# Altium PCB PCB_DCDC.PcbDoc
Units mil, origin at the board's own origin, x right, y up, seen from the top; angles counter-clockwise.
Board outline 2345 x 1155 mil, 2 copper layers (Top Layer, Bottom Layer); 18 components, 11 nets, 43 pads, 2 vias.
Unrouted connection lines stored in the file: 13.
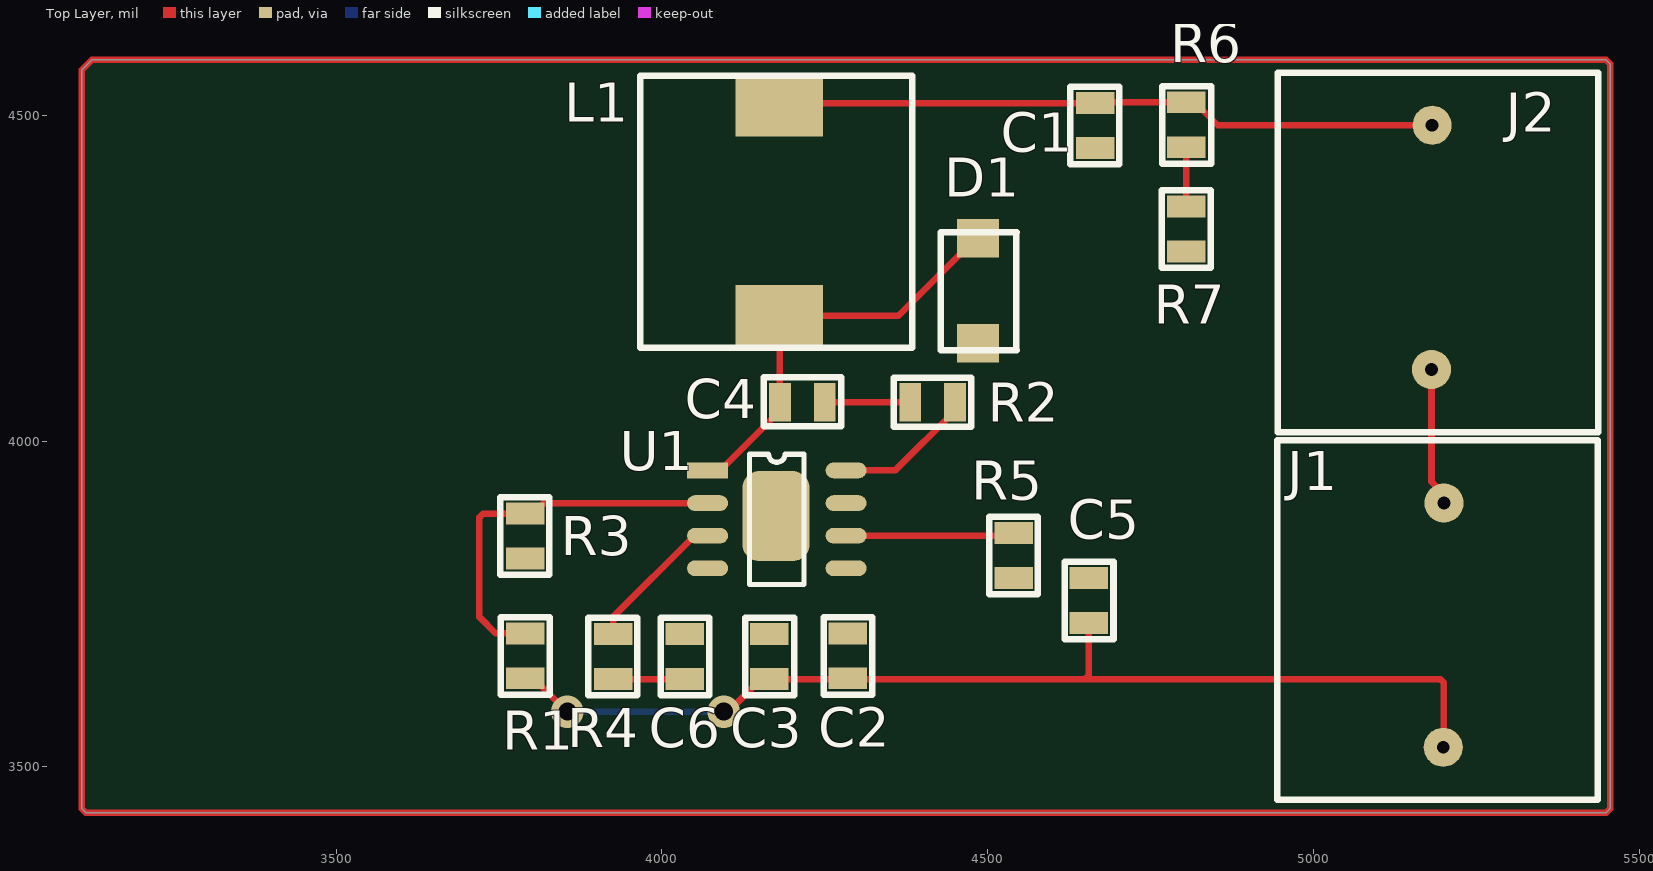
[diagram p0: Top Layer view]
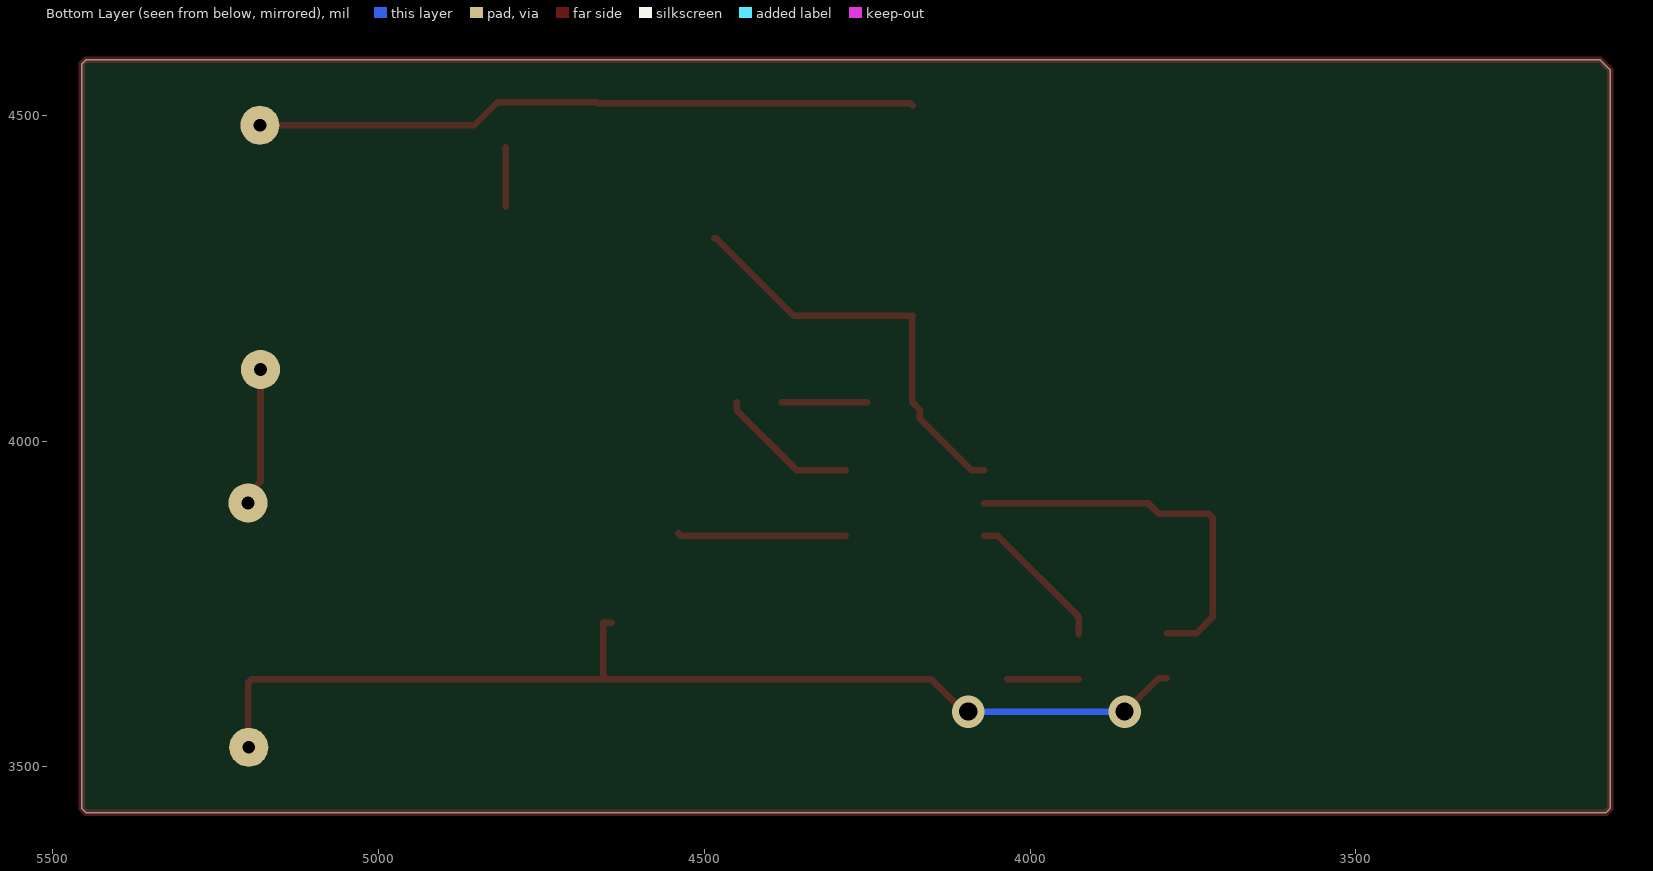
[diagram p1: Bottom Layer view, seen from below]

## Layer stack, top to bottom
Top Solder: solder mask 0.4, Solder Resist, Dk 3.5
Top Layer: signal copper 1.4
Dielectric 1: dielectric 12.6, FR-4, Dk 4.8
Bottom Layer: signal copper 1.4
Bottom Solder: solder mask 0.4, Solder Resist, Dk 3.5

## Board outline
3115.86,3430 3110,3435.86 3110,4570 3125,4585 5449.14,4585 5455,4579.14 5455,3435.86 5449.14,3430

## Design rules (kind name [scope] priority, off if disabled: settings)
Clearance [All] p1: gap=10 ignorepadtopadclearanceinfootprint=FALSE
PolygonConnect [All] p1: connectstyle=Direct reliefconductorwidth=10 reliefentries=4 polygonreliefangle="90 Angle" airgapwidth=10
RoutingVias [All] p1: holewidth=28 width=50 viastyle="Through Hole" minholewidth=28 minwidth=50 maxholewidth=28 maxwidth=50
SolderMaskExpansion [All] p1: expansion=4 istentingtop=FALSE
SupplyNets "Schematic Supply Nets_1" [InNet('GND')] p1: voltage=0.000
SupplyNets "Schematic Supply Nets" [InNet('12V')] p2: voltage=0.000
Width [All] p1: maxlimit=10 minlimit=10 preferedwidth=10
30 further rules are at their usual default settings.

## Components (designator, comment, footprint, x,y, rotation, side; value= is the part's Value field where it differs from the comment)
C1 "Capacitor" 0805 4665,4450 r90 top
C2 "4.7uF" 0805 4285,3705 r270 top
C3 "4.7uF" 0805 4165,3703.9 r270 top
C4 "0.1uF" 0805 4181.1,4060 r0 top
C5 "0.1uF" 0805 4655,3790 r270 top
C6 "220pF" 0805 4035,3703.9 r270 top
D1 "Diodo" SMA 4485,4150 r90 top
J1 "BORNERA IN" Bornera 5201,3905 r270 top
J2 "BORNERA OUT" Bornera 5180,4110 r90 top
L1 "Inductor" SMT 4180,4192.17 r180 top
R1 "100k" 0805 3790,3705 r270 top
R2 "0" 0805 4450,4060 r180 top
R3 "18.7k" 0805 3790,3820 r90 top
R4 "51k" 0805 3925,3635 r90 top
R5 "193.3k" 0805 4540,3790 r90 top
R6 "124k" 0805 4805,4520 r270 top
R7 "40k" 0805 4805,4291.1 r90 top
U1 "MP1584" SOP8 4070,3955 r0 top

## Footprints (in the part's own frame and the unit in brackets; to place one, negate y for a bottom-side part, rotate by r counter-clockwise, add the part's x,y. Pads: shape width x height; smd on the part's side, far side on the other; paste and mask are expansions set on the pad)
0805 [mm]
  rect 0.85x1.5 smd: 1(0,0) 2(1.75,0)
  silkscreen extent -0.64,-0.94 2.39,0.97
Bornera [mil]
  round 60 hole 19.68: 1(0,-1) 2(374.8,-2)
  silkscreen extent -96,-257 455,235
SMA [mm]
  rect 1.5x1.65 smd: 1(0,0) 2(4.1,0)
  silkscreen extent -0.27,-1.5 4.33,1.45
SMT [mm]
  rect 3.4x2.4 smd: 1(0,0) 2(0,-8.2)
  silkscreen extent -5.18,-9.36 5.42,1.24
SOP8 [mm]
  rect 1.6x0.61 smd: 1(0,0)
  oval 1.6x0.61 smd: 2(0,-1.27) 3(0,-2.54) 4(0,-3.81) 5(5.4,-3.81) 6(5.4,-2.54) 7(5.4,-1.27) 8(5.4,0)
  rrect50% 2.62x3.51 smd: 5(2.667,-1.778)
  silkscreen extent 1.63,-4.44 3.77,0.64

## Part data
C2 C3 C4 C5 C6: library part Capacitor
J1 J2: library part Bornera
R1 R2 R3 R4 R5 R6 R7: library part Resistencia
U1: "CHIP DE FUENTE"

## Via types
v1: diameter 50, hole 28, Top Layer to Bottom Layer, 2 vias

## Nets (pads, with @x,y where several pads share a name; then routed paths per layer and width w, separated by ;. In a path a pad name is that pad's centre, name@x,y a point inside that pad or via, vN(x,y) a via of type N, cw(c..) or ccw(c..) an arc to the next point about the centre after c; other vN are vias at no path point)
12V: C2.2 C3.2 C5.2 J1.2 R1.2 U1.7 | length 1655
  Top Layer w10: R1.2 3802.8,3636.1 3853.9,3585 v1(3855,3585) ; v1(4095,3585) 4102.2,3585 4152.2,3635 C3.2 4649.14,3635 ; C5.2@4642.2,3721.1 C5.2 4655,3640.86 4649.14,3635 ; J1.2 5200,3531.2 5200,3629.14 5194.14,3635 4649.14,3635
  Bottom Layer w10: v1(3855,3585) v1(4095,3585)
BST/SW: C4.1 D1.2 L1.1 U1.1 | length 649.5
  Top Layer w10: U1.1 4089.49,3955 4169.37,4034.88 4169.37,4048.27 C4.1 4181.1,4191.06 L1.1 4362.8,4192.17 4482.05,4311.42 D1.2
GND: C1.1 C2.1 C3.1 C5.1 C6.1 D1.1 J1.1 J2.1 R3.1 R5.1 R7.1 U1.5 | length 212.9
  Top Layer w10: J2.1 5181,3937.53 5200,3918.53 J1.1
NetC4_2: C4.2 R2.2 | length 131.1
  Top Layer w10: C4.2 R2.2
NetC6_2: C6.2 R4.1 | length 110
  Top Layer w10: R4.1 C6.2
NetR1_1: R1.1 R3.2 U1.2 | length 592.5
  Top Layer w10: R1.1 3745,3705 3720,3730 3720,3883.04 3725.86,3888.9 R3.2 3802.8,3888.9 3818.9,3905 U1.2
NetR2_1: R2.1 U1.8 | length 218.4
  Top Layer w10: U1.8 4357.8,3955 4450,4047.2 R2.1
NetR4_2: R4.2 U1.3 | length 222.9
  Top Layer w10: R4.2 3925,3730 4050,3855 U1.3
NetR5_2: R5.2 U1.6 | length 259
  Top Layer w10: U1.6 4536.1,3855 R5.2
NetR6_2: R6.2 R7.2 U1.4 | length 91.1
  Top Layer w10: R7.2 R6.2
Vout: C1.2 J2.2 L1.2 R6.1 | length 1018.7
  Top Layer w10: L1.2 4183.9,4518.9 C1.2 4666.1,4520 R6.1 4817.8,4520 4852.99,4484.8 J2.2
copper on no net: | length 6980.9
  Top Layer w10: 3110,3435.86 3115.86,3430 5449.14,3430 5455,3435.86 5455,4579.14 5449.14,4585 3125,4585 3110,4570 3110,3435.86